# EAGLE board L293D (EAGLE 6.4)

Size 50.8 x 34.29 mm. Coordinates in mm from the lower left corner, seen from the top.
Outline: 0,0 0,34.29 50.8,34.29 50.8,0 0,0
Copper layers (1*16): Top 0.0356mm / dielectric 1.5011mm / Bottom 0.0356mm
Design rules "LaenPCBOrder": minimum track width 6mil, minimum drill 13mil, track to track 6mil, track to pad 6mil, pad to pad 6mil, via to via 6mil, smd to smd 6mil, copper to edge 15mil, drill to drill 6mil, minimum pad ring 7mil, minimum via ring 7mil, stop-mask expansion 4mil, vias tented up to drill 0mil, thermal gap 10mil

## Footprints (pad centres in the part's own frame; a part is rotated, then mirrored left to right if it is on the bottom)
DIL16 = drill 0.813 long: 1 -8.89,-3.81; 2 -6.35,-3.81; 3 -3.81,-3.81; 4 -1.27,-3.81; 5 1.27,-3.81; 6 3.81,-3.81; 7 6.35,-3.81; 8 8.89,-3.81; 9 8.89,3.81; 10 6.35,3.81; 11 3.81,3.81; 12 1.27,3.81; 13 -1.27,3.81; 14 -3.81,3.81; 15 -6.35,3.81; 16 -8.89,3.81
2,54/1,0 = drill 1.016 pad 2.54 octagon: 1 0,0
2,8 = hole 2.8: 0,0
R-5 = drill 0.813 pad 1.6 octagon: 1 -2.54,0; 2 2.54,0

## Placement (x,y rotation side)
74HC595  [DIL16]  6.35,11.43 90 top
DI  [2,54/1,0]  21.59,31.75 0 top
DO  [2,54/1,0]  41.91,31.75 0 top
E$1  [2,8]  5.08,29.21 0 top
E$2  [2,8]  45.72,5.08 0 top
GNDI  [2,54/1,0]  10.16,31.75 0 top
GNDO  [2,54/1,0]  30.48,31.75 0 top
GNDS  [2,54/1,0]  44.45,26.67 0 top
HS0  [2,54/1,0]  25.4,12.7 0 top
HS1  [2,54/1,0]  25.4,10.16 0 top
HS2  [2,54/1,0]  39.37,12.7 0 top
HS3  [2,54/1,0]  39.37,10.16 0 top
L293D0  [DIL16]  19.05,11.43 270 top
L293D1  [DIL16]  33.02,11.43 270 top
O00  [2,54/1,0]  44.45,21.59 0 top
O01  [2,54/1,0]  44.45,19.05 0 top
O02  [2,54/1,0]  44.45,16.51 0 top
O03  [2,54/1,0]  44.45,13.97 0 top
O10  [2,54/1,0]  48.26,21.59 0 top
O11  [2,54/1,0]  48.26,19.05 0 top
O12  [2,54/1,0]  48.26,16.51 0 top
O13  [2,54/1,0]  48.26,13.97 0 top
R1  10K  [R-5]  19.05,26.67 0 top
SHI  [2,54/1,0]  13.97,31.75 0 top
SHO  [2,54/1,0]  34.29,31.75 0 top
STI  [2,54/1,0]  17.78,31.75 0 top
STO  [2,54/1,0]  38.1,31.75 0 top
VCCI  [2,54/1,0]  25.4,31.75 0 top
VCCO  [2,54/1,0]  45.72,31.75 0 top
VS  [2,54/1,0]  48.26,26.67 0 top

## Library data of the parts
74HC595 = 74xx-us
DI DO GNDI GNDO GNDS HS0 HS1-HS3 O00 O01-O03 O10-O13 SHI SHO STI STO VCCI VCCO VS = wirepad
E$1 E$2 = holes
L293D0 L293D1 = texas
R1 = discrete

## Nets
GND: 74HC595.8 74HC595.13 GNDI.1 GNDO.1 GNDS.1 HS0.1 HS1.1 HS2.1 HS3.1 L293D0.4 L293D0.5 L293D0.12 L293D0.13 L293D1.4 L293D1.5 L293D1.12 L293D1.13
S$1: 74HC595.10 L293D0.1 L293D0.9 L293D1.1 L293D1.9 R1.2
S$2: 74HC595.11 SHI.1 SHO.1
S$3: 74HC595.12 STI.1 STO.1
S$4: L293D0.8 L293D1.8 VS.1
S$5: 74HC595.14 DI.1
S$6: 74HC595.9 DO.1
S$7: 74HC595.15 L293D0.2
S$8: 74HC595.1 L293D0.7
S$9: 74HC595.2 L293D0.10
S$10: 74HC595.3 L293D0.15
S$11: L293D0.3 O00.1
S$12: L293D0.6 O01.1
S$13: L293D0.11 O02.1
S$14: L293D0.14 O03.1
S$15: 74HC595.4 L293D1.2
S$16: 74HC595.5 L293D1.7
S$17: 74HC595.6 L293D1.10
S$18: 74HC595.7 L293D1.15
S$19: L293D1.3 O10.1
S$20: L293D1.6 O11.1
S$21: L293D1.11 O12.1
S$22: L293D1.14 O13.1
W1: 74HC595.16 L293D0.16 L293D1.16 R1.1 VCCI.1 VCCO.1

## Tracks (layer width: path | path; a pad name or v marks a point on that pad's centre or on a via)
GND  (16 unrouted)
S$1  (5 unrouted)
S$2  (2 unrouted)
S$3  (2 unrouted)
S$4  (2 unrouted)
S$5  (1 unrouted)
S$6  (1 unrouted)
S$7  (1 unrouted)
S$8  (1 unrouted)
S$9  (1 unrouted)
S$10  (1 unrouted)
S$11  (1 unrouted)
S$12  (1 unrouted)
S$13  (1 unrouted)
S$14  (1 unrouted)
S$15  (1 unrouted)
S$16  (1 unrouted)
S$17  (1 unrouted)
S$18  (1 unrouted)
S$19  (1 unrouted)
S$20  (1 unrouted)
S$21  (1 unrouted)
S$22  (1 unrouted)
W1  (5 unrouted)